# Altium PCB 400236.PcbDoc (part 6 of 7)
Units mm, origin at the board's own origin, x right, y up, seen from the top; angles counter-clockwise.
Board outline 136.53 x 63.5 mm, 4 copper layers (Top Layer, Mid-Layer 1, Mid-Layer 2, Bottom Layer), stack 1.49 mm thick; 344 components, 236 nets, 1364 pads, 1393 vias.
Unrouted connection lines stored in the file: 6.
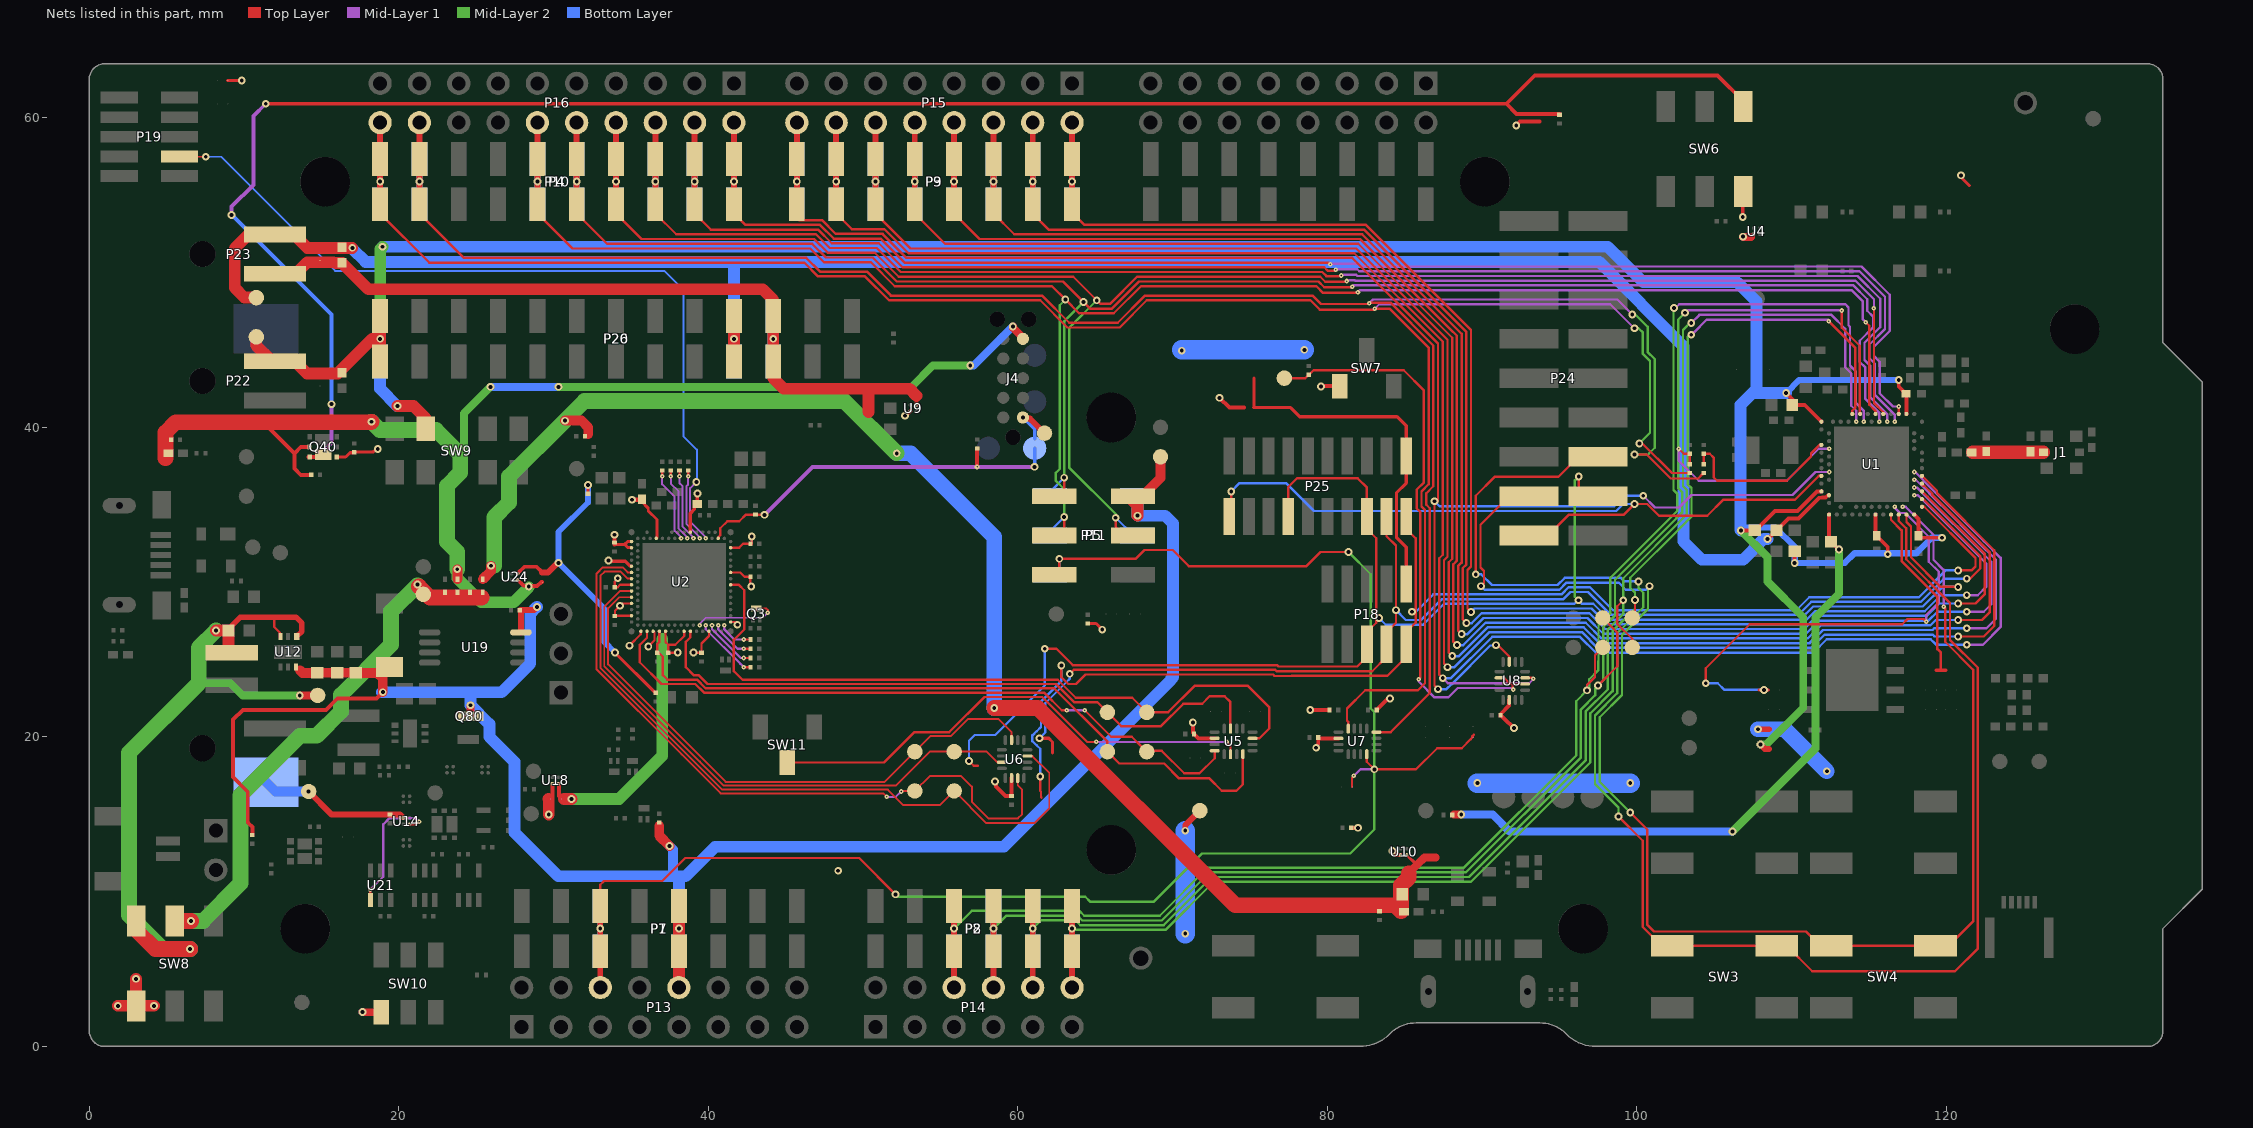
[diagram p6: the nets of this part, all layers, seen from the top]

## Via types
v1: diameter 0.5, hole 0.25, Top Layer to Bottom Layer, tented both sides, 1166 vias
v2: diameter 0.3, hole 0.1, Top Layer to Mid-Layer 1, tented top, 227 vias

## Nets (pads, with @x,y where several pads share a name; then routed paths per layer and width w, separated by ;. In a path a pad name is that pad's centre, name@x,y a point inside that pad or via, vN(x,y) a via of type N, cw(c..) or ccw(c..) an arc to the next point about the centre after c; other vN are vias at no path point) (continued)
P0.22: SB15.1 SB25.1 U1.AD18 | length 12
  Top Layer w0.152: U1.AD18@116.414,34.367 116.414,34.03 117.096,33.347 117.096,31.359 119.411,29.045 119.411,25.674 119.634,25.451 119.634,24.308
  Top Layer w0.203: SB15.1@119.337,24.308 119.634,24.308 119.957,24.308
P0.23: SB10.1 SB20.1 U1.AC19 | length 30.3
  Top Layer w0.152: v1(104.445,23.47) 104.445,24.434 107.29,27.28 117.14,27.28 117.478,27.617 118.509,27.617 v2(118.694,27.432)
  Top Layer w0.203: 107.881,23.038 v1(108.204,23.038) SB10.1@108.501,23.038
  Mid-Layer 1 w0.152: v2(116.664,34.867) 116.664,34.8 116.998,34.465 117.329,34.465 118.855,32.939 118.855,31.325 119.509,30.671 119.509,28.688 118.694,27.872 v2(118.694,27.432)
  Bottom Layer w0.152: v1(104.445,23.47) 105.225,23.47 105.656,23.038 v1(108.204,23.038)
P0.24: P24.14 SW3.2 U1.AD20 | length 103.7
  Top Layer w0.152: v1(89.586,30.505) 89.586,35.585 90.805,36.805 94.92,36.805 96.215,38.1 P24.14@97.472,38.1 ; v1(98.806,14.859) 100.37,13.295 100.37,7.72 101.588,6.502 SW3.2@102.278,6.502 SW3.2@109.028,6.502 109.691,6.502 111.328,4.864 120.548,4.864 122.025,6.341 122.025,24.468 120.221,26.272 120.221,28.663 117.401,31.482 117.401,33.473 116.914,33.961 U1.AD20@116.914,34.367
  Mid-Layer 2 w0.152: v1(98.806,14.859) 98.806,15.447 97.29,16.963 97.29,21.394 98.73,22.834 98.73,26.71 98.977,26.957 98.98,26.957 100.404,28.38 100.404,29.319 100.101,29.621 v1(100.101,30.048)
  Bottom Layer w0.152: v1(89.586,30.505) 89.941,30.505 90.627,29.82 94.871,29.82 95.328,30.277 98.948,30.277 99.177,30.048 v1(100.101,30.048)
P0.25: P24.15 SW4.2 U1.AC21 | length 95.1
  Top Layer w0.152: v1(89.916,29.743) 90.119,29.947 90.119,30.726 89.891,30.955 89.891,33.706 91.745,35.56 P24.15@93.027,35.56 ; v1(99.568,15.113) 100.675,14.006 100.675,7.846 101.09,7.43 110.921,7.43 111.85,6.502 SW4.2@112.54,6.502 SW4.2@119.29,6.502 120.137,6.502 121.72,8.085 121.72,24.345 119.918,26.147 119.918,28.316 v2(119.812,28.423) ; v2@119.812,28.448 v2@119.825,28.435
  Mid-Layer 1 w0.152: v2(117.164,34.867) 117.355,34.867 119.158,33.065 119.158,31.45 119.812,30.796 v2(119.812,28.423)
  Mid-Layer 2 w0.152: v1(99.568,15.113) 97.595,17.086 97.595,21.268 99.035,22.708 99.035,26.584 100.711,28.26 100.711,29.642 v1(100.813,29.743)
  Bottom Layer w0.152: v1(89.916,29.743) 90.145,29.515 94.997,29.515 95.455,29.972 98.822,29.972 99.279,29.515 100.584,29.515 v1(100.813,29.743)
P0.26: C51.2 R1.2 U1.G1 | length 10.8
  Top Layer w0.15: 109.55,36.551 109.674,36.551 109.675,36.552 111.244,38.12 111.244,38.214
  Top Layer w0.152: R1.2@104.318,37.66 C51.2@104.318,38.298 104.704,38.298 104.953,38.049 104.953,36.779 105.181,36.551 109.55,36.551 ; 111.244,38.214 111.244,38.32 111.791,38.867 U1.G1@111.914,38.867
P0.27: C52.2 R2.2 U1.H2 | length 13.3
  Top Layer w0.152: v2(102.692,38.608) 102.7,38.616 103.019,38.298 C52.2@103.403,38.298 R2.2@103.403,37.66
  Mid-Layer 1 w0.152: v2(102.692,38.608) 102.692,37.846 103.988,36.551 109.674,36.551 111.741,38.617 v2@112.378,38.617
  other v2: 112.414,38.617
P0.28/AIN4: P2.3 P8.3 P14.6 TP44.1 U1.B11 | length 107.4
  Top Layer w0.152: v1(96.774,23.012) 96.774,23.354 97.285,23.865 97.285,25.276 TP44.1@97.79,25.781
  Top Layer w0.381: P14.6@55.88,3.81 P2.3@55.88,6.155 v1(55.88,7.62) P2.3@55.88,9.085
  Mid-Layer 1 w0.152: v1@102.438,47.658 102.733,47.953 113.466,47.953 113.665,47.754 113.665,46.598 113.767,46.496 113.767,43.993 114.151,43.608 114.151,41.579 114.664,41.067 v2(114.664,40.367)
  Mid-Layer 2 w0.152: v1(55.88,7.62) 57.023,8.763 63.973,8.763 64.289,8.448 69.164,8.448 72.273,11.557 88.824,11.557 96.071,18.804 96.071,22.31 v1(96.774,23.012) 96.915,23.153 96.915,23.728 97.506,24.319 97.506,24.887 97.511,24.892 97.511,27.215 98.273,27.977 98.273,30.279 102.614,34.62 102.614,35.704 102.36,35.958 102.36,42.339 102.362,42.342 102.362,47.683 v1(102.387,47.709)
  Bottom Layer w0.381: P8.3@55.88,6.155 v1(55.88,7.62) P8.3@55.88,9.085
P0.29/AIN5: P2.4 P8.4 P14.8 TP45.1 U1.A10 | length 106
  Top Layer w0.152: v1(97.485,23.317) 98.73,24.562 98.73,26.746 TP45.1@97.79,27.686 ; v2(113.233,47.549) 113.233,46.445 114.397,45.281 114.397,40.884 U1.A10@114.414,40.867 ; v2@113.309,47.549 v2@113.309,47.574
  Top Layer w0.381: P14.8@58.42,3.81 P2.4@58.42,6.155 v1(58.42,7.62) P2.4@58.42,9.085
  Mid-Layer 1 w0.152: v1(103.099,47.404) 103.269,47.574 v2@113.233,47.574
  Mid-Layer 2 w0.152: v1(58.42,7.62) 59.258,8.458 63.847,8.458 64.162,8.143 69.29,8.143 72.399,11.252 88.95,11.252 96.376,18.678 96.376,21.773 97.305,22.702 97.305,23.137 v1(97.485,23.317) 97.815,23.647 97.815,27.089 98.577,27.851 98.577,30.153 102.54,34.115 102.54,34.119 102.916,34.495 102.916,35.829 102.667,36.078 102.667,46.972 v1(103.099,47.404)
  Bottom Layer w0.381: P8.4@58.42,6.155 v1(58.42,7.62) P8.4@58.42,9.652
P0.30/AIN6: P2.5 P8.5 P14.10 TP46.1 U1.B9 | length 101.3
  Top Layer w0.152: v1(99.111,28.829) 98.73,28.448 98.73,27.305 99.695,26.34 TP46.1@99.695,25.781
  Top Layer w0.381: P14.10@60.96,3.81 P2.5@60.96,6.155 v1(60.96,7.62) P2.5@60.96,9.085
  Mid-Layer 1 w0.152: v1(103.505,46.744) 104.033,47.272 112.56,47.272 113.462,46.37 113.462,43.867 113.846,43.482 113.846,41.399 114.164,41.081 v2(114.164,40.367)
  Mid-Layer 2 w0.152: v1(60.96,7.62) 61.493,8.153 63.721,8.153 64.036,7.838 69.417,7.838 72.526,10.947 89.154,10.947 96.681,18.474 96.681,21.647 98.12,23.086 98.12,26.962 99.111,27.953 v1(99.111,28.829) 99.111,30.255 103.218,34.363 103.218,35.954 102.972,36.201 102.972,46.301 103.541,46.871 v1@103.657,46.871
  Bottom Layer w0.381: P8.5@60.96,6.155 v1(60.96,7.62) P8.5@60.96,9.652
P0.31/AIN7: P2.6 P8.6 P14.12 TP47.1 U1.A8 | length 94.5
  Top Layer w0.152: TP47.1@99.695,27.686 99.873,27.864 v1(99.873,28.854) ; v2@112.446,46.863 112.446,46.801 114.092,45.155 114.092,41.256 113.914,41.077 U1.A8@113.914,40.867
  Top Layer w0.381: P14.12@63.5,3.81 P2.6@63.5,6.155 v1(63.5,7.62) P2.6@63.5,9.085
  Mid-Layer 1 w0.152: v1@103.53,46.109 103.657,46.109 104.513,46.965 112.344,46.965 v2@112.446,46.863
  Mid-Layer 2 w0.152: v1(63.5,7.62) 63.587,7.533 69.543,7.533 72.652,10.643 89.28,10.643 96.986,18.348 96.986,21.521 98.425,22.96 98.425,26.836 99.873,28.284 v1(99.873,28.854) 99.873,29.335 99.57,29.637 99.57,30.284 102.868,33.581 102.868,33.584 103.521,34.237 103.521,36.08 103.274,36.326 103.274,40.968 103.276,40.97 103.276,45.855 v1@103.53,46.109 ; v1@103.594,46.045 v1@103.657,46.109
  Bottom Layer w0.381: P8.6@63.5,6.155 v1(63.5,7.62) P8.6@63.5,9.085
  other v1: 103.505,45.982
  other v2: 112.395,46.863
P1.00: P18.6 P24.16 P25.6 P25.14 SB57.1 U1.AD22 | length 107.9
  Top Layer w0.152: v1(56.845,18.44) 57.15,18.136 57.222,18.136 SB57.1@57.396,18.136 ; v1(61.733,25.694) 62.498,25.694 63.552,24.64 76.75,24.64 76.837,24.554 81.932,24.554 82.55,25.171 P18.6@82.55,25.99 82.55,26.773 83.159,27.381 83.159,32.843 82.55,33.452 P25.6@82.55,34.245 82.55,36.119 81.952,36.716 78.042,36.716 77.47,36.144 P25.14@77.47,34.245 ; v1(96.241,36.83) 96.241,36.119 96.799,35.56 P24.16@97.472,35.56 ; U1.AD22@117.414,34.367 117.414,33.892 117.704,33.602 117.704,31.607 119.618,29.693 v1(120.752,29.693)
  Mid-Layer 2 w0.152: v1(96.215,28.829) 95.987,29.058 95.987,36.576 v1(96.241,36.83)
  Bottom Layer w0.152: v1(56.845,18.44) 56.845,19.753 57.217,20.125 58.541,20.125 61.738,23.322 61.738,25.689 v1(61.733,25.694) ; v1(83.337,27.686) 83.768,27.254 86.182,27.254 87.528,28.6 95.961,28.6 96.19,28.829 v1(96.215,28.829) 96.444,28.6 97.179,28.6 98.2,27.58 106.02,27.58 106.022,27.582 110.54,27.582 111.383,28.425 118.464,28.425 119.731,29.693 v1(120.752,29.693)
P1.01: P3.1 P9.1 P15.2 U1.Y23 | length 99.5
  Top Layer w0.152: P3.1@63.5,54.415 63.5,53.899 64.313,53.086 82.493,53.086 89.281,46.298 89.281,31.013 89.052,30.785 89.052,28.296 v1(89.281,28.067)
  Top Layer w0.381: P3.1@63.5,54.415 v1(63.5,55.88) P3.1@63.5,57.345 P15.2@63.5,59.69
  Mid-Layer 1 w0.152: v2(117.914,35.617) 118.154,35.617 122.58,31.191 122.58,29.718 122.022,29.159 v1(121.31,29.159)
  Bottom Layer w0.152: v1(89.281,28.067) 89.51,28.296 97.056,28.296 98.074,27.277 107.694,27.277 107.696,27.28 110.665,27.28 111.509,28.123 118.589,28.123 119.625,29.159 v1(121.31,29.159)
  Bottom Layer w0.381: P9.1@63.5,53.807 v1(63.5,55.88) P9.1@63.5,57.345
P1.02: P3.2 P9.2 P15.4 U1.W24 | length 102.5
  Top Layer w0.152: P3.2@60.96,54.415 60.96,53.797 61.976,52.781 82.367,52.781 88.976,46.172 88.976,31.14 88.748,30.911 88.748,27.584 v1(88.976,27.356) ; U1.W24@118.414,35.867 118.431,35.867 118.78,35.519 118.78,35.515 122.479,31.816 122.479,29.235 121.869,28.626 v1(120.752,28.626)
  Top Layer w0.381: P3.2@60.96,54.415 v1(60.96,55.88) P3.2@60.96,57.345 P15.4@60.96,59.69
  Bottom Layer w0.152: v1(88.976,27.356) 89.324,27.356 89.959,27.991 96.933,27.991 97.949,26.975 110.788,26.975 111.634,27.821 118.714,27.821 119.519,28.626 v1(120.752,28.626)
  Bottom Layer w0.381: P9.2@60.96,54.415 v1(60.96,55.88) P9.2@60.96,57.345
P1.03: P3.3 P9.3 P15.6 U1.V23 | length 107.4
  Top Layer w0.152: P3.3@58.42,54.415 58.42,53.823 59.766,52.476 82.241,52.476 88.671,46.046 88.671,31.266 88.443,31.037 88.443,26.873 v1(88.671,26.645)
  Top Layer w0.381: P3.3@58.42,54.415 v1(58.42,55.88) P3.3@58.42,57.345 P15.6@58.42,59.69
  Mid-Layer 1 w0.152: v2(117.914,36.117) 118.085,36.117 122.885,31.317 122.885,28.575 122.403,28.092 v1(121.31,28.092)
  Bottom Layer w0.152: v1(88.671,26.645) 89.052,26.645 90.094,27.686 96.81,27.686 97.826,26.67 110.911,26.67 111.759,27.518 118.839,27.518 119.414,28.092 v1(121.31,28.092)
  Bottom Layer w0.381: P9.3@58.42,54.415 v1(58.42,55.88) P9.3@58.42,57.345
P1.04: P3.4 P9.4 P15.8 U1.U24 | length 111
  Top Layer w0.152: P3.4@55.88,54.415 55.88,53.823 57.531,52.172 82.114,52.172 87.956,46.33 88.367,45.919 88.367,31.392 88.138,31.164 88.138,26.162 v1(88.367,25.933) ; U1.U24@118.414,36.367 118.414,36.307 118.487,36.233 118.565,36.233 119.084,35.714 119.084,35.641 122.783,31.942 122.783,28.041 122.301,27.559 v1(120.752,27.559)
  Top Layer w0.381: P3.4@55.88,54.415 v1(55.88,55.88) P3.4@55.88,57.345 P15.8@55.88,59.69
  Bottom Layer w0.152: v1(88.367,25.933) 88.773,25.933 90.221,27.381 96.687,27.381 97.703,26.365 111.034,26.365 111.885,27.216 118.965,27.216 119.308,27.559 v1(120.752,27.559)
  Bottom Layer w0.381: P9.4@55.88,54.415 v1(55.88,55.88) P9.4@55.88,57.345
P1.05: P3.5 P9.5 P15.10 U1.T23 | length 115.8
  Top Layer w0.152: P3.5@53.34,54.415 53.34,53.823 55.296,51.867 81.988,51.867 88.062,45.793 88.062,31.518 87.833,31.29 87.833,31.013 87.833,26.848 87.833,25.451 v1(88.062,25.222)
  Top Layer w0.381: P3.5@53.34,54.415 v1(53.34,55.88) P3.5@53.34,57.345 P15.10@53.34,59.69
  Mid-Layer 1 w0.152: v2(117.914,36.617) 118.016,36.617 119.684,34.95 119.686,34.95 122.072,32.564 122.072,32.561 123.19,31.444 123.19,27.635 122.58,27.026 v1(121.31,27.026)
  Bottom Layer w0.152: v1(88.062,25.222) 88.493,25.222 90.347,27.076 96.564,27.076 97.58,26.06 111.157,26.06 112.01,26.913 119.09,26.913 119.202,27.026 v1(121.31,27.026)
  Bottom Layer w0.381: P9.5@53.34,54.415 v1(53.34,55.88) P9.5@53.34,57.345
P1.06: P3.6 P9.6 P15.12 U1.R24 | length 119.5
  Top Layer w0.152: P3.6@50.8,54.415 50.8,53.823 53.061,51.562 81.862,51.562 87.757,45.667 87.757,31.645 87.528,31.416 87.528,31.14 87.528,31.115 87.528,26.822 87.528,24.74 v1(87.757,24.511) ; U1.R24@118.414,36.867 118.431,36.867 119.389,35.909 119.389,35.767 123.088,32.068 123.088,27.178 122.403,26.492 v1(120.752,26.492)
  Top Layer w0.381: P3.6@50.8,54.415 v1(50.8,55.88) P3.6@50.8,57.345 P15.12@50.8,59.69
  Bottom Layer w0.152: v1(87.757,24.511) 88.213,24.511 90.473,26.772 96.442,26.772 97.458,25.756 111.28,25.756 112.135,26.611 119.107,26.611 119.225,26.492 v1(120.752,26.492)
  Bottom Layer w0.381: P9.6@50.8,54.415 v1(50.8,55.88) P9.6@50.8,57.345
P1.07: P3.7 P9.7 P15.14 U1.P23 U8.3 | length 130.9
  Top Layer w0.152: P3.7@48.26,54.415 48.26,53.823 49.276,52.807 51.385,52.807 52.934,51.257 81.736,51.257 87.452,45.541 87.452,31.771 87.224,31.542 87.224,31.266 87.224,30.989 87.224,24.028 v1(87.452,23.8) ; U8.3@92.773,23.822 93.196,23.822 v2@93.294,23.724
  Top Layer w0.381: P3.7@48.26,54.415 v1(48.26,55.88) P3.7@48.26,57.345 P15.14@48.26,59.69
  Mid-Layer 1 w0.152: v1(87.452,23.8) 87.782,23.47 93.04,23.47 v2@93.294,23.724 ; v2(117.914,37.117) 117.984,37.117 118.515,36.587 118.515,36.552 122.415,32.652 ; v1(121.31,25.959) 122.352,25.959 123.495,27.102 123.495,31.57 122.415,32.649
  Bottom Layer w0.152: v1(87.452,23.8) 87.986,23.8 90.653,26.467 96.319,26.467 97.337,25.448 106.398,25.448 106.401,25.451 111.406,25.451 112.264,26.309 118.975,26.309 119.223,26.06 119.227,26.06 119.328,25.959 v1(121.31,25.959)
  Bottom Layer w0.381: P9.7@48.26,54.415 v1(48.26,55.88) P9.7@48.26,57.345
  other v2: 93.294,23.749
P1.08: P3.8 P9.8 P15.16 U1.P2 U8.7 | length 109.9
  Top Layer w0.152: P3.8@45.72,54.415 45.72,53.543 45.872,53.391 47.339,53.391 48.228,52.502 51.259,52.502 52.808,50.952 81.609,50.952 87.147,45.414 v1@87.147,35.23 ; v1(86.919,35.23) 86.919,31.392 86.919,30.863 86.919,23.317 v1(87.147,23.089) ; v1(90.884,25.93) 91.013,25.93 91.748,25.196 U8.7@91.748,24.847
  Top Layer w0.381: P3.8@45.72,54.415 v1(45.72,55.88) P3.8@45.72,57.345 P15.16@45.72,59.69
  Mid-Layer 1 w0.152: v1(100.406,35.585) 101.171,34.821 102.715,34.821 103.53,35.636 110.053,35.636 111.534,37.117 v2(112.414,37.117)
  Bottom Layer w0.152: v1(86.919,35.23) 87.249,34.9 98.531,34.9 99.217,35.585 v1(100.406,35.585) ; v1(87.147,23.089) 87.69,23.089 87.995,23.393 88.01,23.393 90.522,25.905 v1@90.884,25.905
  Bottom Layer w0.381: P9.8@45.72,54.415 v1(45.72,55.88) P9.8@45.72,57.345
P1.09: P24.17 P25.20 U1.R1 | length 51
  Top Layer w0.15: 110.058,35.331 110.203,35.331 111.739,36.867 U1.R1@111.914,36.867
  Top Layer w0.152: P25.20@73.66,33.401 P25.20@73.66,34.245 73.787,34.372 v1(73.787,35.865) ; P24.17@93.027,33.02 94.259,33.02 95.606,34.366 99.162,34.366 v1(99.847,35.052) 100.66,35.052 101.422,34.29 104.546,34.29 105.588,35.331 110.058,35.331
  Bottom Layer w0.152: v1@73.66,35.738 v1(73.787,35.865) 74.32,36.398 77.326,36.398 79.129,34.595 98.658,34.595 99.115,35.052 v1(99.847,35.052)
P1.10: P4.1 P10.1 P16.2 U1.A20 | length 94.7
  Top Layer w0.152: P4.1@41.656,54.415 41.656,53.823 42.393,53.086 47.213,53.086 48.102,52.197 51.132,52.197 52.682,50.648 80.061,50.648 v2(80.173,50.535) ; U1.A20@116.914,40.867 v2(116.914,41.351)
  Top Layer w0.381: P4.1@41.656,54.415 v1(41.656,55.88) P4.1@41.656,57.345 P16.2@41.656,59.69
  Mid-Layer 1 w0.152: v2(80.173,50.535) 80.217,50.579 81.994,50.579 82.179,50.394 114.499,50.394 116.327,48.565 116.327,46.229 115.311,45.213 115.311,44.603 115.675,44.24 115.675,42.211 116.534,41.351 v2(116.914,41.351)
  Bottom Layer w0.381: P10.1@41.656,54.415 v1(41.656,55.88) P10.1@41.656,57.345
P1.11: P4.2 P10.2 P16.4 U1.B19 | length 97.2
  Top Layer w0.152: P4.2@39.116,54.415 39.116,53.823 40.157,52.781 47.086,52.781 47.975,51.892 51.006,51.892 52.556,50.343 79.795,50.343 80.006,50.131 80.49,50.131 v2(80.533,50.175)
  Top Layer w0.381: P4.2@39.116,54.415 v1(39.116,55.88) P4.2@39.116,57.345 P16.4@39.116,59.69
  Mid-Layer 1 w0.152: v2(80.533,50.175) 80.577,50.219 81.922,50.219 82.052,50.089 114.372,50.089 116.023,48.439 116.023,46.356 115.007,45.34 115.007,44.477 115.37,44.113 115.37,42.084 116.664,40.791 v2(116.664,40.367)
  Bottom Layer w0.381: P10.2@39.116,54.415 v1(39.116,55.88) P10.2@39.116,57.345
P1.12: P4.3 P10.3 P16.6 U1.B17 | length 99.3
  Top Layer w0.152: P4.3@36.576,54.415 36.576,53.823 37.922,52.476 46.96,52.476 47.849,51.587 50.88,51.587 52.429,50.038 79.669,50.038 79.935,49.771 80.85,49.771 v2(80.893,49.815)
  Top Layer w0.381: P4.3@36.576,54.415 v1(36.576,55.88) P4.3@36.576,57.345 P16.6@36.576,59.69
  Mid-Layer 1 w0.152: v2(80.893,49.815) 80.937,49.859 81.851,49.859 81.926,49.784 114.246,49.784 115.718,48.312 115.718,46.482 114.702,45.466 114.702,44.351 115.065,43.987 115.065,41.958 116.164,40.86 v2(116.164,40.367)
  Bottom Layer w0.381: P10.3@36.576,54.415 v1(36.576,55.88) P10.3@36.576,57.345
P1.13: P4.4 P5.4 P10.4 P11.4 P16.8 U1.A16 | length 121.1
  Top Layer w0.152: P4.4@34.036,54.415 34.036,53.823 35.687,52.172 46.834,52.172 47.723,51.283 50.754,51.283 52.303,49.733 63.576,49.733 v1(65.1,48.209) 65.329,47.981 65.947,47.981 67.7,49.733 79.542,49.733 79.864,49.412 81.209,49.412 v2(81.253,49.455) ; v1(66.319,34.163) 66.319,33.579 66.878,33.02 P5.4@67.119,33.02 ; v2(115.291,47.701) 115.311,47.68 115.311,41.584 115.914,40.982 U1.A16@115.914,40.867
  Top Layer w0.381: P4.4@34.036,54.415 v1(34.036,55.88) P4.4@34.036,57.345 P16.8@34.036,59.69
  Mid-Layer 1 w0.152: v2(81.253,49.455) 81.297,49.499 81.78,49.499 81.8,49.479 114.12,49.479 115.316,48.283 115.316,47.727 v2(115.291,47.701)
  Mid-Layer 2 w0.152: v1(65.1,48.209) 65.093,48.209 63.312,46.429 63.312,37.402 66.319,34.394 v1(66.319,34.163)
  Bottom Layer w0.152: v1(66.319,34.163) 67.462,33.02 P11.4@67.722,33.02
  Bottom Layer w0.381: P10.4@34.036,54.415 v1(34.036,55.88) P10.4@34.036,57.345
P1.14: P4.5 P5.1 P10.5 P11.1 P16.10 U1.B15 | length 120.3
  Top Layer w0.152: P4.5@31.496,54.415 31.496,53.823 33.452,51.867 46.708,51.867 47.597,50.978 50.627,50.978 52.177,49.428 62.916,49.428 v1(64.237,48.108) 64.668,47.676 66.074,47.676 67.826,49.428 79.416,49.428 79.793,49.052 81.569,49.052 v2(81.613,49.095) ; P5.1@62.674,35.56 62.992,35.878 v1(62.992,36.754)
  Top Layer w0.381: P4.5@31.496,54.415 v1(31.496,55.88) P4.5@31.496,57.345 P16.10@31.496,59.69
  Mid-Layer 1 w0.152: v2(81.613,49.095) 81.692,49.174 113.994,49.174 114.884,48.284 114.884,47.537 115.252,47.169 115.252,46.447 114.397,45.592 114.397,44.225 114.761,43.861 114.761,41.832 115.664,40.929 v2(115.664,40.367)
  Mid-Layer 2 w0.152: v1(62.992,36.754) 63.007,36.769 63.007,46.878 v1(64.237,48.108)
  Bottom Layer w0.152: P11.1@61.473,35.56 P11.1@62.072,35.56 62.072,35.834 v1(62.992,36.754)
  Bottom Layer w0.381: P10.5@31.496,54.415 v1(31.496,55.88) P10.5@31.496,57.345
P1.15: P4.6 P5.3 P10.6 P11.3 P16.12 U1.A14 | length 123.4
  Top Layer w0.152: P4.6@28.956,54.415 28.956,53.823 31.217,51.562 46.581,51.562 47.47,50.673 50.501,50.673 52.051,49.124 62.205,49.124 v1(63.068,48.26) 63.957,47.371 66.2,47.371 67.952,49.124 79.29,49.124 79.722,48.692 81.929,48.692 v2(81.973,48.735) ; P5.3@62.674,33.02 62.992,33.338 v1(62.992,34.214) ; v2(114.783,46.787) 115.007,46.563 115.007,41.457 115.414,41.05 U1.A14@115.414,40.867
  Top Layer w0.381: P4.6@28.956,54.415 v1(28.956,55.88) P4.6@28.956,57.345 P16.12@28.956,59.69
  Mid-Layer 1 w0.152: v2(81.973,48.735) 82.107,48.87 113.867,48.87 114.579,48.158 114.579,47.012 v2@114.783,46.809
  Mid-Layer 2 w0.152: v1(62.992,34.214) 62.992,35.999 62.459,36.533 62.459,37.069 62.702,37.313 62.702,47.894 v1(63.068,48.26)
  Bottom Layer w0.152: P11.3@62.072,33.02 62.072,33.294 v1(62.992,34.214)
  Bottom Layer w0.381: P10.6@28.956,54.415 v1(28.956,55.88) P10.6@28.956,57.345
RESET_PIN: P1.3 P5.5 P7.3 P11.5 P13.6 SB43.2 SB44.1 U7.4 | length 114.6
  Top Layer w0.152: P1.3@33.02,9.085 33.02,10.445 33.268,10.693 37.023,10.693 38.506,12.177 49.748,12.177 v1(52.095,9.83) ; P5.5@62.679,30.485 v1(62.679,31.506) 67.6,31.506 68.174,32.08 70.002,32.08 71.044,31.039 78.638,31.039 79.553,31.953 v1(81.356,31.953) ; 81.592,16.764 81.592,17.117 81.592,17.356 v2@81.737,17.501 ; U7.4@82.54,18.885 82.54,18.399 v1(83.033,17.907) 85.724,17.907 87.091,19.275 88.675,19.275 89.259,19.859 89.408,20.008 ; 89.366,20.049 89.459,20.142
  Top Layer w0.381: P13.6@33.02,3.81 P1.3@33.02,6.155 v1(33.02,7.62) P1.3@33.02,9.085
  Mid-Layer 1 w0.152: v2@81.737,17.501 82.144,17.907 v1(83.033,17.907)
  Mid-Layer 2 w0.152: v1(52.095,9.83) 52.248,9.677 64.352,9.677 64.667,9.362 68.785,9.362 71.894,12.471 81.471,12.471 83.027,14.027 83.027,15.23 83.033,15.236 v1(83.033,17.907) 83.033,21.608 82.803,21.837 82.803,30.506 v1(81.356,31.953)
  Bottom Layer w0.152: P11.5@62.679,30.48 v1(62.679,31.506)
  Bottom Layer w0.381: P7.3@33.02,6.155 v1(33.02,7.62) P7.3@33.02,9.085
  other v2: 81.712,17.501
RF: C4.2 C22.1 J1.1 L1.2 | length 4.6
  Top Layer w0.871: L1.2@121.681,38.379 J1.1@126.25,38.379
SCL: P4.10 P10.10 P16.20 R2.1 U7.12 | length 140.5
  Top Layer w0.152: P4.10@18.796,54.415 18.796,53.823 21.971,50.648 46.203,50.648 47.092,49.759 50.122,49.759 51.672,48.209 61.442,48.209 63.194,46.457 66.579,46.457 68.331,48.209 78.911,48.209 79.508,47.612 83.009,47.612 v2(83.053,47.656) 84.044,47.656 86.538,45.162 86.538,36.321 86.081,35.864 86.081,34.883 86.309,34.654 86.309,23.47 85.852,23.012 82.448,23.012 81.267,21.831 81.267,21.044 81.34,20.971 U7.12@81.34,20.535 ; v1(100.152,38.964) 100.347,38.964 102.258,37.053 R2.1@103.403,37.053
  Top Layer w0.381: P4.10@18.796,54.415 v1(18.796,55.88) P4.10@18.796,57.345 P16.20@18.796,59.69
  Mid-Layer 1 w0.152: v2(83.053,47.656) 83.352,47.955 98.273,47.955 99.822,46.406 v1(99.847,46.406)
  Mid-Layer 2 w0.152: v1(99.847,46.406) 100.101,46.406 100.381,46.126 100.381,44.751 100.838,44.294 100.838,39.649 v1(100.152,38.964)
  Bottom Layer w0.381: P10.10@18.796,54.415 v1(18.796,55.88) P10.10@18.796,57.345
SDA: P4.9 P10.9 P16.18 R1.1 U7.8 | length 140.2
  Top Layer w0.152: P4.9@21.336,54.415 21.336,53.823 24.206,50.952 46.329,50.952 47.218,50.063 50.249,50.063 51.798,48.514 61.568,48.514 63.321,46.761 66.452,46.761 68.205,48.514 79.037,48.514 79.579,47.972 82.649,47.972 v2(82.693,48.016) 82.736,48.059 84.071,48.059 86.843,45.288 86.843,36.195 86.385,35.738 86.385,35.009 86.614,34.78 86.614,22.835 84.089,20.31 U7.8@83.165,20.31 ; v1(99.847,38.252) 100.627,38.252 102.183,36.697 103.962,36.697 104.244,36.979 104.244,36.994 104.303,37.053 R1.1@104.318,37.053
  Top Layer w0.381: P4.9@21.336,54.415 v1(21.336,55.88) P4.9@21.336,57.345 P16.18@21.336,59.69
  Mid-Layer 1 w0.152: v2(82.693,48.016) 82.937,48.26 98.73,48.26 v1(99.695,47.295)
  Mid-Layer 2 w0.152: v1(99.695,47.295) 99.892,47.295 100.686,46.501 100.686,44.878 101.143,44.42 101.143,38.684 100.711,38.252 v1(99.847,38.252)
  Bottom Layer w0.381: P10.9@21.336,54.415 v1(21.336,55.88) P10.9@21.336,57.345
SWD0_CLK: R12.1 U2.B18 | length 4.8
  Top Layer w0.152: v2(37.579,36.834) R12.1@37.579,37.209
  Mid-Layer 1 w0.125: v2(37.579,36.834) 37.579,36.361 38.076,35.864 38.076,33.464 38.376,33.164 38.379,33.164 38.576,32.967 38.576,32.964 38.639,32.902 v2(38.639,32.827)
SWD0_IO: R11.1 U2.B16 | length 4.9
  Top Layer w0.152: v2(37.021,36.834) R11.1@37.021,37.209
  Mid-Layer 1 w0.125: v2(37.021,36.834) 37.021,36.32 37.826,35.514 37.826,33.317 38.176,32.967 38.176,32.889 v2(38.239,32.827)
SWD0_RESET: R15.1 U2.B22 | length 4.8
  Top Layer w0.152: v2(38.697,36.834) R15.1@38.697,37.209
  Mid-Layer 1 w0.125: v2(38.697,36.834) 38.697,36.31 38.576,36.189 38.576,33.767 39.376,32.967 39.376,32.914 39.439,32.852 v2(39.439,32.827)
SWD0_SEL: P19.3 U2.B24 | length 53.1
  Top Layer w0.125: P19.3@5.836,57.506 5.857,57.484 v1(7.529,57.484)
  Mid-Layer 1 w0.125: v1(39.225,36.475) 38.826,36.076 38.826,33.917 39.776,32.967 39.776,32.889 v2(39.839,32.827)
  Bottom Layer w0.125: v1(7.529,57.484) 8.519,57.484 15.885,50.118 37.164,50.118 38.383,48.899 38.383,39.44 39.256,38.567 39.256,36.506 v1(39.225,36.475)
SWD0_SWO: R14.1 U2.B20 | length 4.8
  Top Layer w0.152: v2(38.138,36.834) R14.1@38.138,37.209
  Mid-Layer 1 w0.125: v2(38.138,36.834) 38.138,36.402 38.326,36.214 38.326,33.617 38.976,32.967 38.976,32.914 39.039,32.852 v2(39.039,32.827)
SWD1_CLK: R17.1 U2.AK28 | length 2.9
  Top Layer w0.152: v2(42.3,25.7) R17.1@42.715,25.7
  Mid-Layer 1 w0.152: v2(40.639,27.227) 40.639,26.946 41.885,25.7 v2(42.3,25.7)
SWD1_IO: R16.1 U2.AK30 | length 2.2
  Top Layer w0.152: v2(42.3,26.3) R16.1@42.715,26.3
  Mid-Layer 1 w0.152: v2(41.039,27.227) 41.039,26.938 41.677,26.3 v2(42.3,26.3)
SWD1_RESET: R19.1 U2.AK24 | length 4.2
  Top Layer w0.152: v2(42.3,24.5) R19.1@42.715,24.5
  Mid-Layer 1 w0.152: v2(39.839,27.227) 39.839,26.961 42.063,24.737 v2(42.3,24.5)
SWD1_SEL: Q3.3 U2.AK22 | length 5.8
  Top Layer w0.125: Q3.3@43.1,28.3 43.75,28.3 43.85,28.2 v2(43.85,28.025)
  Mid-Layer 1 w0.125: v2(39.439,27.227) 39.439,27.274 39.501,27.337 39.501,27.367 39.835,27.7 43.525,27.7 v2(43.85,28.025)
SWD1_SWO: R18.1 U2.AK26 | length 3.5
  Top Layer w0.152: v2(42.3,25.1) R18.1@42.715,25.1
  Mid-Layer 1 w0.152: v2(40.239,27.227) 40.239,26.954 42.092,25.1 v2(42.3,25.1)
SWD3_CLK: TP6.1 U2.R1 U6.3 | length 46.7
  Top Layer w0.125: U2.R1@35.039,30.227 35.02,30.246 34.773,30.246 34.331,30.688 33.294,30.688 33.025,30.419 33.025,24.479 40.904,16.6 51.6,16.6 52.604,15.596 54.966,15.596 TP6.1@55.88,16.51 57.963,14.427 61.062,14.427 62.027,15.392 62.027,17.678 60.938,18.767 U6.3@60.617,18.767
SWD3_IO: TP5.1 U2.N1 U6.15 | length 44.5
  Top Layer w0.125: U2.N1@35.039,30.627 34.789,30.627 34.466,30.95 33.175,30.95 32.775,30.55 32.775,24.375 38.275,18.875 40.8,16.35 51.3,16.35 v2(51.525,16.125) ; v2(52.475,16.475) 52.51,16.51 TP5.1@53.34,16.51 54.305,17.475 56.337,17.475 57.023,16.789 57.023,15.798 58.089,14.732 59.995,14.732 60.274,15.011 60.274,16.588 59.992,16.87 U6.15@59.992,17.342
  Mid-Layer 1 w0.125: v2(51.525,16.125) 52.125,16.125 v2(52.475,16.475)
SWD3_RESET: TP7.1 U2.AA1 U6.7 | length 37.2
  Top Layer w0.125: U2.AA1@35.039,29.027 34.23,29.027 33.525,28.321 33.525,24.686 41.111,17.1 51.39,17.1 54.34,20.05 55.675,20.05 56.775,21.15 58.758,21.15 59.592,20.317 U6.7@59.592,19.792
SWD3_SWO: TP8.1 U2.W1 U6.11 | length 36.1
  Top Layer w0.125: U2.W1@35.039,29.427 34.792,29.427 34.277,29.427 33.275,28.425 33.275,24.582 39.45,18.407 41.007,16.85 52.112,16.85 54.312,19.05 57.983,19.05 58.665,18.367 U6.11@58.967,18.367
SWDCLK: P18.4 P25.4 SB55.1 U1.AA24 | length 83.9
  Top Layer w0.152: v1@61.374,19.736 61.392,19.754 v1(61.392,19.914) ; v1(63.349,24.078) 63.607,24.335 76.624,24.335 76.71,24.249 82.897,24.249 83.82,25.171 P18.4@83.82,25.99 83.82,26.773 84.429,27.381 v1(84.429,28.194) 84.429,32.36 83.82,32.968 P25.4@83.82,34.245 ; U1.AA24@118.414,35.367 118.496,35.367 122.174,31.689 122.174,30.886 v1@121.514,30.226
  Top Layer w0.203: v1(61.392,19.914) 62.001,19.914 62.238,19.677 62.238,19.327 SB55.1@62.238,18.974
  Bottom Layer w0.152: v1(61.392,19.914) 61.775,20.297 61.775,22.182 63.289,23.696 63.296,23.696 63.349,23.749 v1(63.349,24.078) ; v1(84.429,28.194) 85.064,27.559 86.056,27.559 87.402,28.905 95.25,28.905 95.707,29.362 96.844,29.362 98.322,27.884 110.415,27.884 111.258,28.728 118.338,28.728 119.837,30.226 v1(121.31,30.226)
SWDIO: P18.2 P25.2 SB54.1 U1.AC24 | length 87.1
  Top Layer w0.152: v1(61.443,17.45) 61.443,16.505 61.493,16.454 61.493,16.111 SB54.1@61.526,16.078 ; v1(62.81,24.616) 62.81,23.862 63.254,23.419 63.754,23.419 64.366,24.03 76.498,24.03 76.589,23.939 77.682,23.939 77.687,23.944 83.863,23.944 85.09,25.171 P18.2@85.09,25.99 85.09,26.773 85.699,27.381 85.699,32.843 85.09,33.452 P25.2@85.09,34.245 ; U1.AC24@118.414,34.867 118.565,34.867 121.869,31.563 121.869,31.012 121.616,30.759 v1(120.752,30.759)
  Bottom Layer w0.152: v1(61.443,17.45) 61.443,19.232 61.213,19.462 61.205,19.462 60.941,19.727 60.941,20.1 61.205,20.365 61.215,20.365 61.498,20.648 61.498,22.297 62.81,23.61 v1(62.81,24.616) ; 85.725,28.092 86.843,29.21 95.124,29.21 95.581,29.667 96.967,29.667 98.448,28.187 110.29,28.187 111.133,29.03 118.213,29.03 119.942,30.759 v1(120.752,30.759)
  other v1: 85.471,28.092
TRACE_SW: R4.1 TP23.1 U8.2 U8.10 | length 37.7
  Top Layer w0.152: TP23.1@77.216,43.18 78.568,43.18 R4.1@78.717,43.329 ; R4.1@78.791,43.403 78.85,43.462 78.877,43.462 79.107,43.691 84.934,43.691 86.233,42.393 86.233,36.448 85.776,35.99 85.776,34.756 86.004,34.528 86.004,23.825 v2(85.903,23.724) ; U8.10@91.123,23.822 91.418,23.822 91.818,23.422 91.973,23.422 ; v2@91.973,23.114 91.973,23.422 ; U8.2@92.773,23.422 91.973,23.422
  Mid-Layer 1 w0.152: v2(85.903,23.724) 85.903,23.579 86.926,22.555 87.808,22.555 88.417,23.165 91.923,23.165 v2@91.999,23.089
  other v2: 91.999,23.063
U\A\R\T\_\F\C\_\O\F\F\: SW11.2 U5.2 | length 32.3
  Top Layer w0.152: SW11.2@45.1,18.35 51.35,18.35 53.314,20.314 55.566,20.314 57.836,22.584 61.578,22.584 64.487,19.675 65.05,19.675 v2(65.075,19.7) ; v2(73.5,19.675) 73.739,19.436 U5.2@73.739,18.885
  Mid-Layer 1 w0.152: v2(65.075,19.7) 65.1,19.675 v2(73.5,19.675)
USB_DETECT: Q40.3 R26.1 SB31.2 SW6.3 | length 128.6
  Top Layer w0.254: v1(11.405,60.909) 91.567,60.909 ; Q40.3@14.163,38.085 14.742,38.085 v2(15.113,38.456) ; R26.1@94.996,60.241 94.982,60.255 92.221,60.255 91.567,60.909 ; SW6.3@106.869,60.484 106.869,61.076 105.207,62.738 93.396,62.738 91.567,60.909
  Mid-Layer 1 w0.254: v1(9.2,53.721) 9.2,54.26 10.604,55.664 10.604,60.109 v1(11.405,60.909) ; v2(15.113,38.456) 15.646,38.989 v1(15.646,41.504)
  Bottom Layer w0.254: v1@9.22,53.721 15.646,47.294 v1(15.646,41.504)
V5V: C82.2 C83.2 C85.2 C96.2 D84.2 P1.5 P5.2 P7.5 P11.2 P13.10 Q80.2 R83.1 R93.1 TP36.1 U12.6 U19.8 | length 134.5
  Top Layer w0.254: R83.1@10.538,13.671 10.538,14.176 10.259,14.456 10.259,14.478 10.244,14.493 10.244,16.452 9.296,17.399 9.296,21.121 9.925,21.75 15.3,21.75 16.025,22.475 18.553,22.475 v1(18.97,22.892)
  Top Layer w0.381: C85.2@27.856,28.194 28.727,28.194 v1(28.931,28.397) ; U19.8@27.893,26.756 C85.2@27.893,28.157
  Top Layer w0.508: Q80.2@24.639,21.336 v1(24.639,22.046)
  Top Layer w0.635: 13.612,24.307 13.779,24.14 14.715,24.14 C82.2@14.725,24.15 C83.2@16.025,24.15 16.03,24.145 C96.2@17.21,24.145 ; C96.2@17.215,24.14 18.598,24.14 18.97,23.768 v1(18.97,22.892) ; C96.2@17.218,24.143 C96.2@17.22,24.145 ; 36.83,14.257 36.83,13.614 v1(37.49,12.954) ; P5.2@67.119,35.56 68.047,35.56 69.215,36.728 TP36.1@69.215,38.1
  Top Layer w0.762: P13.10@38.1,3.81 P1.5@38.1,6.155 v1(38.1,7.62) P1.5@38.1,9.085 ; P5.2@67.119,35.56 67.722,34.957 v1(67.722,34.296)
  Bottom Layer w0.508: 24.639,22.81 24.714,22.885
  Bottom Layer w0.635: v1(37.49,12.954) 37.719,12.725 37.719,10.998
  Bottom Layer w0.762: v1@18.923,22.885 24.714,22.885 26.645,22.885 28.499,24.74 28.499,27.965 v1(28.931,28.397) ; 24.639,22.81 v1(24.639,22.046) 25.857,20.828 25.857,20.015 27.47,18.402 27.47,13.83 30.302,10.998 37.719,10.998 38.125,10.998 ; P7.5@38.1,6.155 v1(38.1,7.62) P7.5@38.1,9.085 38.1,10.973 38.125,10.998 ; P11.2@67.722,35.56 v1(67.722,34.296) 69.514,34.296 70.028,33.782 70.028,23.868 69.901,23.741 69.901,23.707 59.097,12.903 40.437,12.903 38.532,10.998 38.125,10.998
VBAT: Bat1.1 R95.1 TP26.1 U14.A1 | length 9.7
  Top Layer w0.381: v1(14.175,16.475) 15.672,14.978 19.431,14.978 20.087,14.978 U14.A1@20.225,14.84
  Bottom Layer w0.635: Bat1.1@11.43,17.085 12.04,16.475 v1(14.175,16.475)
VBAT_EN: U14.B2 U21.4 | length 8.5
  Top Layer w0.152: v2(18.161,10.135) 18.161,9.474 U21.4@18.171,9.464 ; U14.B2@20.698,14.367 21.149,14.367 v2(21.311,14.529)
  Mid-Layer 1 w0.152: v2(18.161,10.135) 18.999,10.973 18.999,14.351 19.406,14.757 21.082,14.757 v2(21.311,14.529)
VBOOST_SRC: C80.2 L80.1 SW8.6 TP28.1 U12.1 U12.3 | length 48.1
  Top Layer w0.15: 11.961,27.736 11.961,27.101 12.309,26.753 U12.3@12.309,26.466
  Top Layer w0.25: v1(13.6,22.675) v1@13.604,22.679 ; TP28.1@14.754,22.679 TP28.1@14.757,22.682
  Top Layer w0.35: 9.004,26.47 C80.2@9.004,26.871 ; C80.2@9.004,26.875 9.2,27.071 9.2,27.175 9.761,27.736 11.961,27.736 13.358,27.736 13.739,27.355 13.739,26.814 U12.1@13.4,26.475
  Top Layer w0.5: v1@13.604,22.679 TP28.1@14.754,22.679
  Top Layer w0.8: v1(8.195,26.879) C80.2@9,26.879 ; L80.1@9,25.5 9,26.466
  Top Layer w1.016: SW8.6@3.028,8.109 3.028,7.529 4.258,6.299 v1(6.518,6.299)
  Mid-Layer 2 w0.5: 7.071,23.471 9.129,23.471 9.925,22.675 v1(13.6,22.675)
  Mid-Layer 2 w1.016: v1(6.518,6.299) 4.751,6.299 2.575,8.475 2.575,18.975 7.071,23.471 7.071,25.755 v1(8.195,26.879)
VBOOST_SRC': D80.1 D81.1 D82.1 D83.1 SW8.5 TP32.1 | length 34.2
  Top Layer w1.016: SW8.5@5.528,8.109 v1(6.576,8.109) ; v1@21.311,29.718 22.022,29.007 25.349,29.007
  Mid-Layer 2 w1.016: v1(6.576,8.109) 7.347,8.109 9.779,10.541 9.779,16.229 13.625,20.075 14.7,20.075 16.262,21.637 16.262,22.712 19.5,25.95 19.5,28.1 v1@21.209,29.809
  other v1: 21.209,29.845
VBUS: C69.2 D80.2 FB61.2 J4.5 Q40.2 R40.1 SB48.2 U24.A2 | length 86.5
  Top Layer w0.25: U24.A2@27.683,30.153 28.054,29.782 28.054,29.771 v1@28.354,29.771 ; v1@28.441,29.741 28.941,29.741 29.212,30.012
  Top Layer w0.254: 11.258,40.329 13.233,38.354 13.259,38.354 ; Q40.2@14.168,38.735 13.665,38.735 13.284,38.354 13.259,38.354 ; R40.1@14.345,36.932 13.665,36.932 13.259,37.338 13.259,38.354
  Top Layer w0.26: v1@28.354,29.771 v1(28.4,29.725) ; v1@28.4,29.7 v1@28.441,29.741 ; 29.212,30.012 29.261,30.012
  Top Layer w0.508: v1(59.675,46.522) 59.694,46.503 59.694,46.426 60.325,45.796 J4.5@60.325,45.72
  Top Layer w0.635: v1(23.774,30.836) 23.8,30.81 D80.2@23.8,30.186
  Top Layer w1.016: 4.923,38.011 4.923,38.6 4.923,39.192 4.923,39.67 5.582,40.329 11.258,40.329 18.206,40.329 v1(18.237,40.361)
  Mid-Layer 2 w0.508: 23.978,38.252 24.206,38.481 24.206,40.894 v1(25.933,42.621) ; v1(30.328,42.621) 53.137,42.621 54.508,43.993 v1(56.921,43.993)
  Mid-Layer 2 w0.762: v1(23.774,30.836) 23.774,30.251 25.326,28.7 27.425,28.7 v1@28.4,29.675
  Mid-Layer 2 w1.016: v1(18.237,40.361) 18.771,39.827 22.403,39.827 23.978,38.252 23.978,37.084 23.114,36.22 23.114,32.614 23.774,31.953 v1(23.774,30.836)
  Bottom Layer w0.508: v1(25.933,42.621) v1(30.328,42.621) ; v1(56.921,43.993) 57.146,43.993 v1(59.675,46.522)
VBUS_IMCU: R7.2 R13.1 SB48.1 U24.A1 | length 20.6
  Top Layer w0.2: v1(33.975,25.45) 36.565,22.86 R7.2@36.6,22.86
  Top Layer w0.203: R13.1@32.225,35.71 v1(32.225,36.275)
  Top Layer w0.25: U24.A1@27.683,30.553 28.13,31 28.898,31 29.112,30.786
  Top Layer w0.26: 29.112,30.786 29.261,30.637
  Top Layer w0.381: 29.261,30.637 29.614,30.637 29.653,30.637 30.266,31.25 v1(30.325,31.25)
  Bottom Layer w0.381: v1(32.225,36.275) 32.225,35.15 30.325,33.25 v1(30.325,31.25) 33.275,28.3 33.275,26.15 v1(33.975,25.45)
VBUS_nRF: C21.1 R98.2 U1.AD2 | length 42
  Top Layer w0.25: U1.AD2@112.414,34.367 112.414,32.742 C21.1@112.539,32.617 v1@113.053,32.103
  Top Layer w0.508: R98.2@88.189,14.986 v1(88.646,14.986)
  Mid-Layer 2 w0.508: v1(106.172,13.894) 111.531,19.253 111.531,27.732 113.055,29.256 v1(113.055,32.106)
  Bottom Layer w0.508: v1(88.646,14.986) 90.678,14.986 91.77,13.894 v1(106.172,13.894)
VBUS_NRF': C68.2 C91.2 D81.2 FB60.2 R97.1 SB80.2 U10.A2 | length 95.3
  Top Layer w0.2: 85.253,11.198 85.253,11.598
  Top Layer w0.203: U10.A2@85.125,12.375 85.765,11.735 85.79,11.735
  Top Layer w0.508: 85.253,11.198 85.79,11.735 86.272,12.217 86.564,12.217 86.656,12.217 86.995,12.217
  Top Layer w0.635: D81.2@25.425,30.186 25.959,30.719 v1(25.959,31.064) ; v1(30.734,40.437) 31.801,40.437 32.24,39.998 32.24,39.573
  Top Layer w1.016: v1(58.475,21.875) 61.284,21.875 74.04,9.119 83.363,9.119 84.379,9.119 84.76,8.738 84.76,9.119 84.76,9.83 84.76,10.414 85.253,10.907 85.253,11.198
  Mid-Layer 2 w1.016: v1@26.162,31.064 26.162,34.188 27.127,35.154 27.127,36.83 v1(30.734,40.437) 32.006,41.709 48.791,41.709 v1(52.175,38.325)
  Bottom Layer w1.016: v1(52.175,38.325) 53.064,38.325 58.475,32.914 v1(58.475,21.875)
VCOM_CTS: R10.1 TP1.1 U2.AL9 U5.4 | length 46.2
  Top Layer w0.152: U2.AL9@36.839,26.827 36.839,26.139 36.7,26 R10.1@36.7,25.435 36.815,25.435 37.064,25.186 37.064,23.986 37.348,23.702 39.274,23.702 39.838,23.139 62.351,23.139 65.786,19.704 TP1.1@65.786,19.05 66.548,18.288 69.453,18.288 70.418,17.323 72.377,17.323 73.175,16.525 74.125,16.525 74.539,16.939 U5.4@74.539,18.885
VCOM_RTS: TP3.1 U2.AL5 U5.16 | length 42.8
  Top Layer w0.152: U2.AL5@36.039,26.827 36.039,26.414 35.575,25.95 35.575,24.825 36.975,23.425 39.159,23.425 39.723,22.862 61.693,22.862 62.829,21.725 v2(63.16,21.725) ; v2(64.325,21.725) 66.035,20.015 67.361,20.015 TP3.1@67.988,19.388 ; TP3.1@68.326,19.05 68.389,19.113 69.287,19.113 70.75,17.65 71.737,17.65 72.714,18.627 U5.16@72.714,19.11
  Mid-Layer 1 w0.152: v2(63.16,21.725) v2(64.325,21.725)
VCOM_RxD: TP2.1 U2.AL19 U5.11 | length 41.8
  Top Layer w0.152: U2.AL19@38.839,26.785 38.839,26.439 38.55,26.15 38.55,24.5 39.07,23.98 39.389,23.98 39.953,23.416 62.466,23.416 63.63,22.252 65.124,22.252 TP2.1@65.786,21.59 66.675,20.701 69.247,20.701 70.695,22.149 71.907,22.149 72.39,22.631 73.355,22.631 73.732,22.254 U5.11@73.732,20.532
VCOM_TxD: TP4.1 U2.U31 U5.7 | length 46.2
  Top Layer w0.152: U2.U31@41.439,29.827 41.973,29.827 42.326,29.474 42.326,26.951 41.651,26.276 41.651,24.717 41.65,24.715 41.65,24.585 41.651,24.583 41.651,24.249 42.206,23.694 62.581,23.694 63.745,22.53 67.386,22.53 TP4.1@68.326,21.59 69.705,21.59 71.434,23.319 74.826,23.319 76.251,21.895 76.251,20.566 75.592,19.907 U5.7@75.157,19.907
VDBG: P18.1 P25.1 SB59.1 SB60.1 | length 23
  Top Layer w0.203: SB60.1@75.268,43.18 75.268,41.607 75.268,41.3 75.242,41.275 75.417,41.275 77.622,41.275 78.207,40.691 84.506,40.691 85.09,40.107 P25.1@85.09,38.145 85.09,36.398 84.455,35.763 84.455,32.893 85.09,32.258 P18.1@85.09,29.89
VDD: C42.2 C45.2 C48.2 C50.2 Q40.4 R41.1 R52.1 R53.1 R54.2 R68.2 SB9.1 SB17.1 SB31.1 SB37.2 SB38.2 SB47.1 SB59.2 SW6.6 SW7.3 SW8.3 SW10.6 TP37.1 U4.A2 U5.14 U6.14 U7.14 U8.14 U9.B2 U10.B2 U18.A2 | length 65.8
  Top Layer w0.2: 8.923,62.408 v1(9.855,62.408) ; Q40.4@16.058,38.085 16.571,38.085 16.85,38.364 17.085,38.364 R41.1@17.12,38.399 18.324,38.399 18.533,38.608 v1(18.644,38.608) ; R68.2@64.516,27.325 65.055,27.325 v1(65.448,26.932) ; v1(120.929,56.286) 120.929,56.179 121.489,55.619
  Top Layer w0.254: 29.941,15.992 U18.A2@29.941,16.95 ; v1@52.75,40.75 U9.B2@53.05,41.05 ; v1(58.522,17.12) 58.59,17.052 58.59,16.798 59.202,16.185 C45.2@59.573,16.185 ; C45.2@59.588,16.185 59.588,16.888 59.592,16.891 U6.14@59.592,17.342 ; v1(71.306,20.938) 71.306,20.282 71.38,20.208 C42.2@71.38,20.193 71.38,20.178 71.388,20.17 71.403,20.17 71.665,19.907 U5.14@72.707,19.907 ; v1(73.025,41.91) 73.66,41.275 74.443,41.275 74.618,41.275 ; v1@78.892,21.717 v1@78.918,21.742 ; v1(78.892,21.742) v1@78.918,21.742 ; v1(79.273,19.304) 79.273,19.4 79.406,19.533 79.406,19.949 79.414,19.941 79.429,19.941 79.46,19.91 U7.14@80.715,19.91 ; v1(79.578,42.647) 79.597,42.665 SW7.3@80.8,42.665 ; R53.1@80.131,21.742 v1@78.918,21.742 ; R54.2@81.535,14.125 v1(81.975,14.125) ; R52.1@83.191,21.742 83.191,21.757 83.199,21.765 83.214,21.765 83.859,22.411 83.981,22.411 v1(84.049,22.479) ; v1(84.2,12.625) 84.222,12.625 84.472,12.375 U10.B2@84.73,12.375 ; U8.14@91.748,22.397 91.737,22.386 91.737,22.021 91.2,21.483 91.2,21.42 C50.2@91.192,21.412 91.192,21.397 91.2,21.389 91.215,21.389 91.401,21.203 91.421,21.203 v1(92.05,20.574) ; v1(92.202,59.512) 92.448,59.759 93.701,59.759 ; v1(106.832,53.594) 106.832,54.948 SW6.6@106.869,54.984 ; 107.292,52.225 U4.A2@107.537,52.47
  Top Layer w0.381: v1(70.815,13.945) 70.815,14.3 TP37.1@71.755,15.24 ; v1(107.823,20.498) 108.352,20.498 108.527,20.498
  Top Layer w0.508: v1(17.653,2.235) 17.674,2.214 SW10.6@18.875,2.214 ; v1@106.858,52.299 107.366,52.299
  Top Layer w0.762: v1(1.848,2.628) v1(4.185,2.628) ; SW8.3@3.027,2.559 v1(3.027,4.369) ; 29.679,15.992 29.693,15.979 v1(29.693,14.986)
  Bottom Layer w1.016: v1(107.823,20.498) 109.55,20.498 v1(112.268,17.78)
  Bottom Layer w1.27: v1@70.587,45.009 v1(78.511,45.009) ; v1(70.815,7.29) v1(70.815,13.945) ; v1(89.687,17.018) v1(99.568,17.018)
  other v1: 48.387,11.354 52.7,40.75 70.587,44.958 106.858,52.324
VDD_HV: C19.1 P20.10 P23.1 P26.10 R91.2 SB41.1 TP25.1 U1.Y2 | length 134.7
  Top Layer w0.25: v1@108.562,32.708 108.562,32.891 C19.1@109.014,33.342 109.783,34.112 110.447,34.112 111.793,35.458 111.989,35.458 112.179,35.459 112.337,35.617 U1.Y2@112.414,35.617
  Top Layer w0.762: TP25.1@10.795,48.387 10.033,48.387 9.398,49.022 9.398,51.562 10.306,52.47 P23.1@11.811,52.47 ; P23.1@11.811,52.4 13.284,52.4 14.089,51.595 16.995,51.595 v1(17,51.6) ; P20.10@41.656,44.255 v1(41.656,45.72) P20.10@41.656,47.185
  Bottom Layer w0.762: v1@16.995,51.545 17.853,50.687 41.65,50.687 ; P26.10@41.656,44.255 v1(41.656,45.72) P26.10@41.656,47.185 41.656,50.681 41.65,50.687 ; v1(108.433,32.791) 108.206,32.791 106.863,31.448 104.188,31.448 102.997,32.639 102.997,45.253 97.563,50.687 41.65,50.687
VDD_HV': P20.11 P23.2 P26.11 R91.1 SB41.2 SB81.1 U9.A1 | length 53.2
  Top Layer w0.26: U9.A1@53.45,41.45 53.45,42.05
  Top Layer w0.762: P23.2@11.811,49.86 13.284,49.86 14.089,50.665 15.781,50.665 ; 15.91,50.613 16.349,50.613 18.042,48.92 43.51,48.92 44.196,48.235 P20.11@44.196,47.185 v1(44.196,45.72) P20.11@44.196,44.255 44.196,43.18 44.822,42.554 ; 44.876,42.5 53,42.5 53.45,42.05 ; 50.35,40.987 50.35,41.012 50.35,42.424
  Bottom Layer w0.762: P26.11@44.196,44.255 v1(44.196,45.72) P26.11@44.196,47.185
VDD_IMCU: C24.1 C25.1 C26.1 C27.1 C28.1 C31.1 C32.1 C33.1 C34.1 C35.2 J4.1 R8.2 SB37.1 TP35.1 TP48.1 U2.A19 U2.AC1 U2.AG1 U2.AJ31 U2.AL3 U2.AL7 U2.AL11 U2.AL17 U2.AL25 U2.B8 U2.B28 U2.C1 U2.E1 U2.E31 U2.L1 U2.N31 U2.U1 U18.A1 | length 71.8
  Top Layer w0.15: C26.1@33.964,27.812 33.987,27.835 35.031,27.835 U2.AG1@35.039,27.827 ; C26.1@34.021,27.869 33.975,27.916 33.975,28.15 v1(34.3,28.475) 34.452,28.627 U2.AC1@35.039,28.627 ; v1(34.15,30.25) 33.949,30.049 C25.1@33.949,29.677 34.152,29.677 34.302,29.827 U2.U1@35.039,29.827 ; v1(34.9,25.9) 35.639,26.639 U2.AL3@35.639,26.827 ; v1(36.125,25.85) 36.525,26.25 36.525,26.741 U2.AL7@36.439,26.827 ; U2.AL11@37.239,26.827 37.239,26.127 37.415,25.95 ; C27.1@37.415,25.387 37.479,25.45 v1(38.025,25.45) ; C27.1@37.415,25.437 37.415,25.95 ; U2.AL17@38.439,26.827 38.439,26.527 37.862,25.95 37.415,25.95 ; v1@39.025,25.45 v1(39.038,25.45) 39.038,25.437 C31.1@39.564,25.437 39.564,26.039 40.039,26.514 U2.AL25@40.039,26.827 ; U2.B28@40.639,32.827 40.639,32.902 40.776,33.039 40.776,33.484 41.232,33.939 42,33.939 42.426,34.365 C34.1@43.05,34.365 ; U2.AJ31@41.439,27.427 41.698,27.427 v1(41.875,27.25) ; U2.N31@41.439,30.627 42.064,30.627 42.336,30.354 C32.1@42.715,30.354 ; C32.1@42.715,30.352 42.715,29.785 v1(42.775,29.725) ; C34.1@43.05,34.35 v1(43.625,34.35)
  Top Layer w0.152: U2.E31@41.439,32.227 41.989,32.227 42.253,32.491 C33.1@42.715,32.491 42.804,32.491 v1(42.804,32.956)
  Top Layer w0.187: C35.2@35.714,35.352 35.714,35.186 36.12,34.78 36.12,34.603 36.682,34.042 36.682,32.87 U2.B8@36.639,32.827
  Top Layer w0.2: v1(33.55,31.4) 33.598,31.352 34.636,31.352 34.961,31.027 U2.L1@35.039,31.027 ; C24.1@33.939,32.437 34.549,32.437 ; U2.E1@35.039,32.227 35.034,32.232 34.809,32.232 34.601,32.439 34.789,32.627 U2.C1@35.039,32.627
  Top Layer w0.225: U2.A19@38.839,33.227 38.839,34.439 39.101,34.701 39.101,34.914 39.239,35.052 39.264,35.052 39.3,35.088 v1(39.3,35.725)
  Top Layer w0.25: C24.1@33.939,32.437 v1(33.939,33.065)
  Top Layer w0.254: 30.347,16.196 30.347,16.407 U18.A1@30.347,16.958 ; v2(57.364,37.444) 57.364,38.632 57.372,38.64 R8.2@57.375,38.64
  Top Layer w0.3: v1@35.039,35.327 v1(35.064,35.327) 35.689,35.327 C35.2@35.714,35.352
  Top Layer w0.381: v1(60.325,40.64) 60.403,40.562 60.784,40.562 TP35.1@61.722,39.624
  Top Layer w0.762: 30.678,15.992 v1(31.16,15.992)
  Mid-Layer 1 w0.254: v1(43.625,34.35) 46.719,37.444 v2(57.364,37.444) 61.069,37.444 v1(61.075,37.45)
  Mid-Layer 2 w0.762: v1(31.16,15.992) 34.242,15.992 37.025,18.775 37.025,26.325
  Bottom Layer w0.203: v1(60.325,40.64) 61.087,39.878 TP48.1@61.087,39.268 ; v1(61.075,37.45) 61.087,37.462 TP48.1@61.087,38.656
VDD_NRF: C6.1 C7.1 C8.1 C12.1 C14.1 L4.1 P20.1 P22.1 P26.1 R90.2 SB18.1 SB40.1 SW9.6 TP24.1 U1.A22 U1.AD14 U1.AD23 U1.B1 U1.W1 | length 194.8
  Top Layer w0.25: v1(106.714,33.342) C6.1@107.613,33.342 107.664,33.342 108.916,34.595 110.371,34.595 111.641,35.865 U1.W1@111.914,35.865 ; v1(109.639,42.217) 110.039,41.817 C14.1@110.039,41.444 110.837,41.444 U1.B1@111.914,40.367 ; v1@110.189,31.117 L4.1@110.189,31.992 ; C7.1@115.414,32.992 U1.AD14@115.414,34.367 ; C7.1@115.49,32.992 116.205,32.277 v1@116.205,32.004 ; v1(116.915,43.067) 116.915,42.641 C12.1@117.389,42.167 117.414,42.142 U1.A22@117.414,40.867 ; U1.AD23@117.914,34.367 118.189,34.092 C8.1@118.189,32.992 118.313,32.868 v1(119.71,32.868)
  Top Layer w0.381: v1(107.975,19.507) 108.255,19.228 108.352,19.228 108.527,19.228
  Top Layer w0.762: TP24.1@10.795,45.847 10.795,45.286 11.811,44.27 13.284,44.27 14.064,43.49 16.058,43.49 18.288,45.72 v1(18.796,45.72) ; P20.1@18.796,44.255 v1(18.796,45.72) ; P20.1@18.796,47.185 v1(18.796,45.72) ; v1(19.914,41.377) 20.955,41.377 21.749,40.583 SW9.6@21.749,39.906
  Mid-Layer 2 w0.508: v1(106.714,33.342) 108.433,31.623 108.433,30.048 110.744,27.737 110.744,21.895 108.356,19.507 v1(107.975,19.507)
  Mid-Layer 2 w0.762: v1(18.796,45.72) 18.8,45.724 18.8,51.525 v1(18.95,51.675)
  Bottom Layer w0.4: v1(106.714,33.342) 106.894,33.522 108.946,33.522 110.189,32.28 v1@110.189,31.318 ; v1(109.639,42.217) 110.489,43.067 v1@116.839,43.067 ; v1(110.189,31.244) 113.427,31.244 114.054,31.871 118.054,31.871 119.05,32.868 v1(119.71,32.868)
  Bottom Layer w0.762: P26.1@18.796,47.185 v1(18.796,45.72) P26.1@18.796,44.255 18.796,42.494 v1(19.914,41.377) ; v1(18.95,51.675) 98.109,51.675 100.407,49.377 106.477,49.377 107.729,48.126 107.729,42.493 ; v1(106.714,33.342) 106.692,33.364 106.692,41.456 107.729,42.493 ; v1(109.639,42.217) 107.729,42.217 107.729,42.493
  other v1: 116.205,31.801